# Altium PCB V10_xxxF030F4_20200425.PcbDoc
Units mm, origin at the board's own origin, x right, y up, seen from the top; angles counter-clockwise.
Board outline 36.45 x 71.03 mm, 2 copper layers (Top Layer, Bottom Layer); 13 components, 86 nets, 52 pads, 0 vias.
Unrouted connection lines stored in the file: 14.
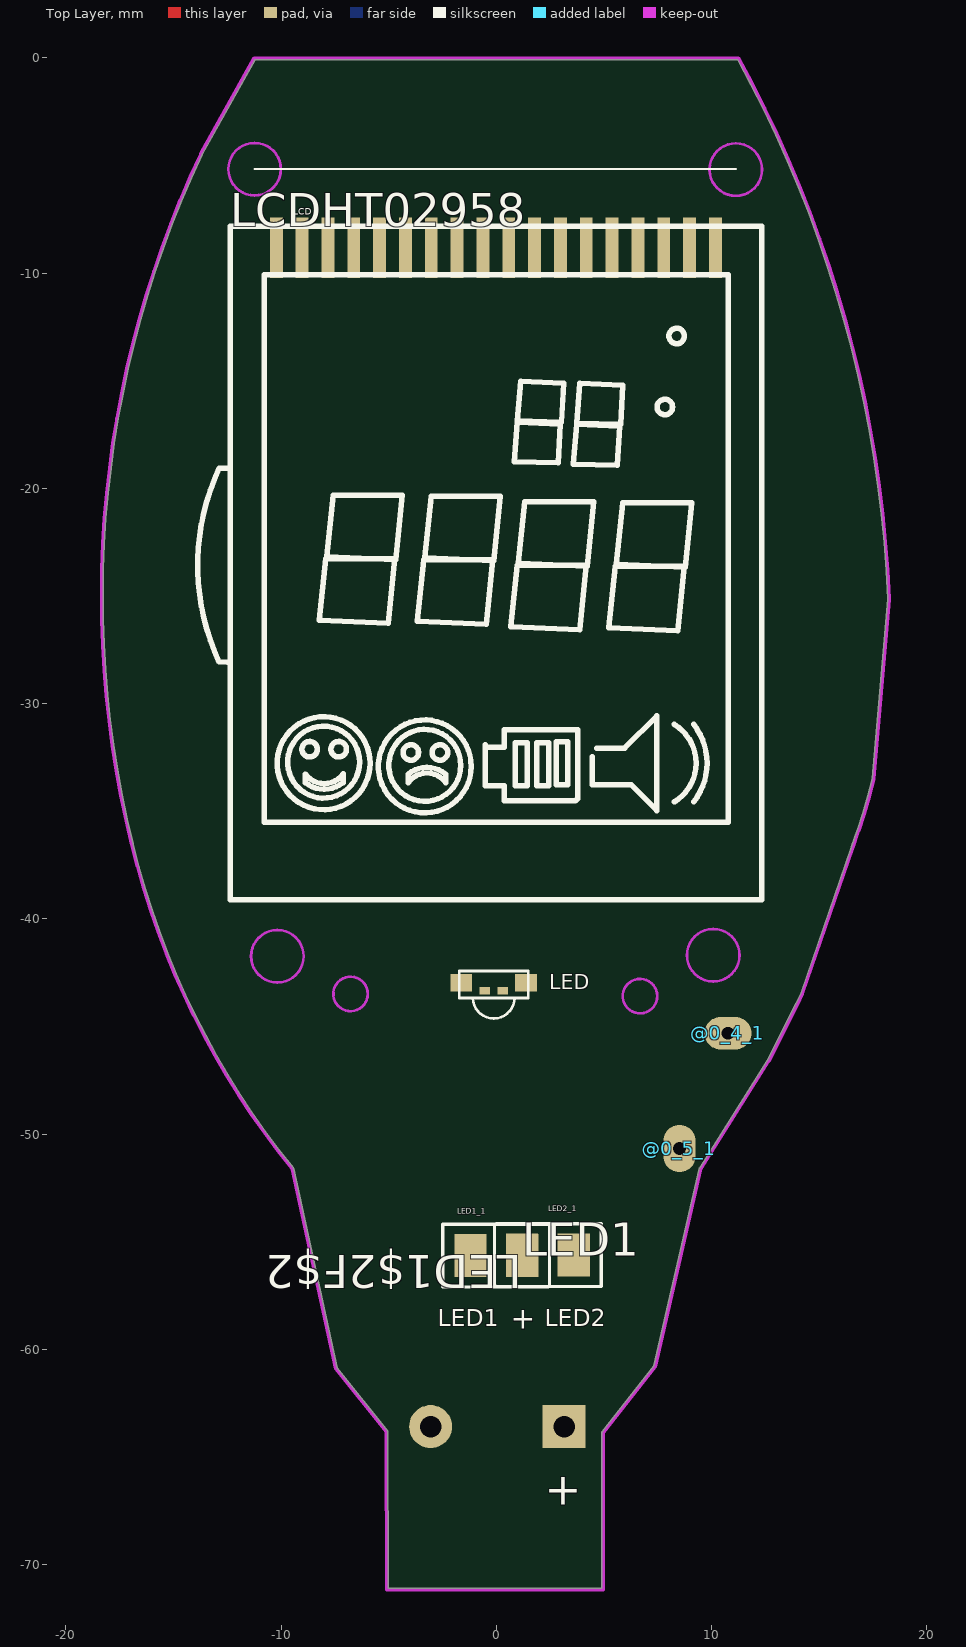
[diagram p0: Top Layer view]
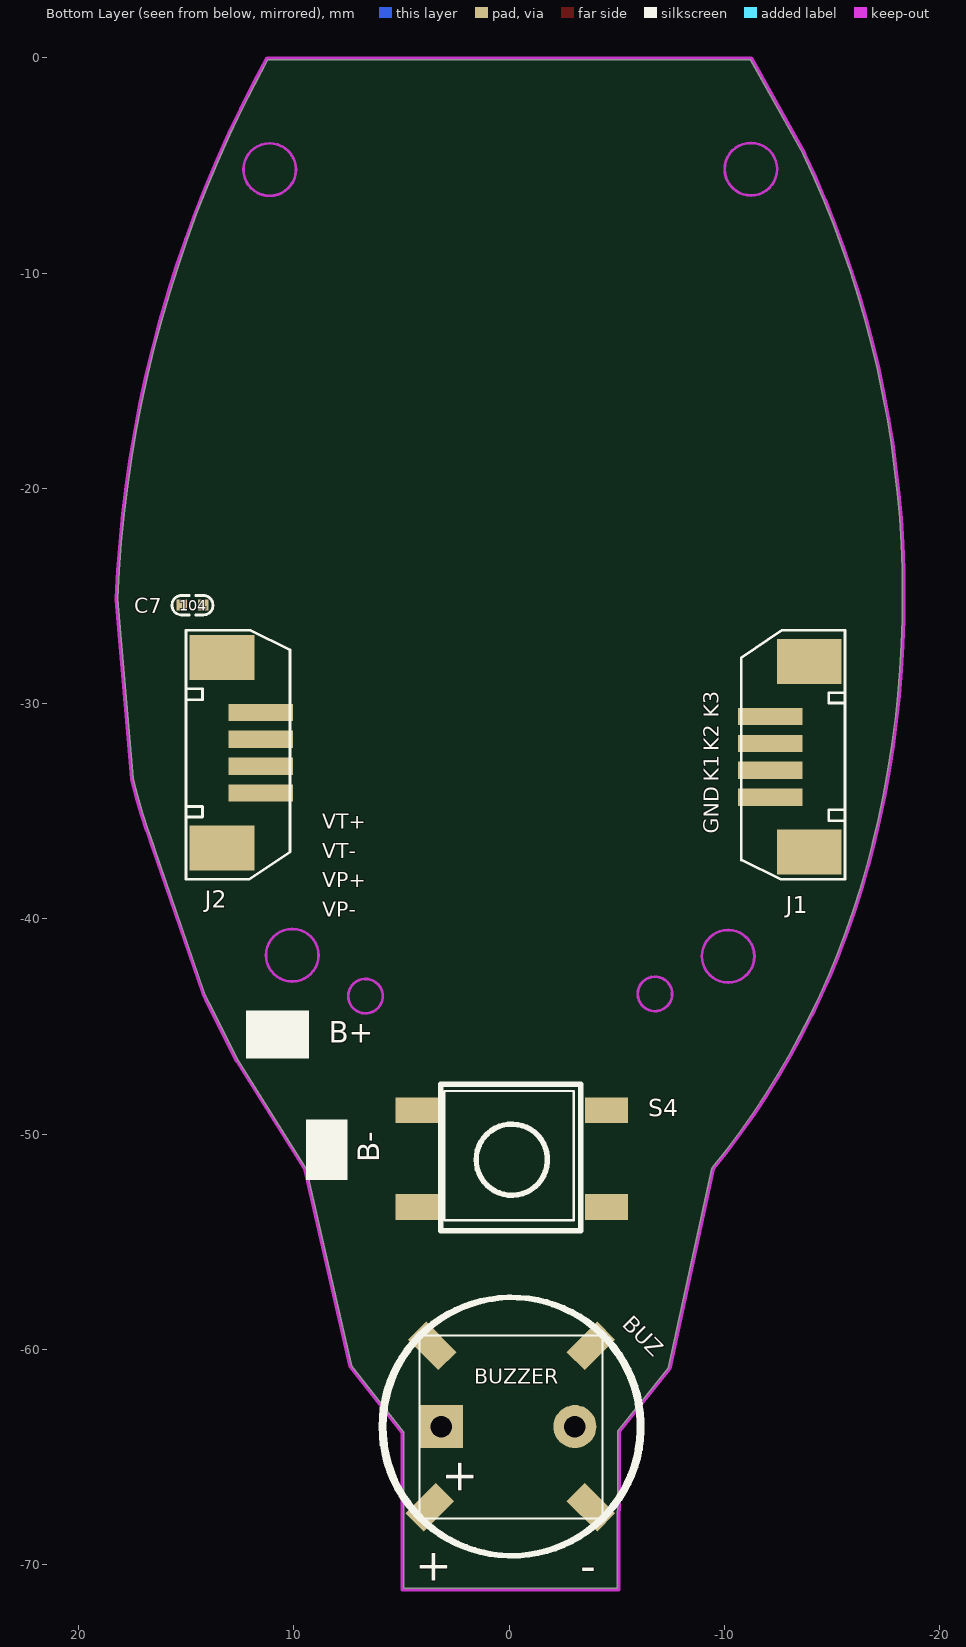
[diagram p1: Bottom Layer view, seen from below]

## Layer stack, top to bottom
Top Solder: solder mask 0.0102, Solder Resist, Dk 3.5
Top Layer: signal copper 0.0356
Dielectric 1: dielectric 0.32, FR-4, Dk 4.8
Bottom Layer: signal copper 0.0356
Bottom Solder: solder mask 0.0102, Solder Resist, Dk 3.5

## Board outline
-7.395,-60.867 -5.049,-63.799 ccw(c-5.108,-63.846) -5.049,-63.799 cw(c-5.108,-63.846) -5.033,-63.846 -5.012,-71.109 4.905,-71.09 4.905,-63.869 cw(c4.98,-63.869) 4.921,-63.822 7.315,-60.774 9.434,-51.589 9.435,-51.589 9.434,-51.589 cw(c9.508,-51.606) 9.444,-51.566 12.595,-46.578 13.944,-43.899 14.157,-43.441 16.486,-36.691 cw(c16.559,-36.707) 16.489,-36.681 ccw(c-10.251,-26.79) 16.496,-36.661 ccw(c-10.251,-26.79) 16.497,-36.659 ccw(c-10.251,-26.79) 17.46,-33.494 cw(c17.533,-33.511) 17.466,-33.478 cw(c17.541,-33.479) 17.466,-33.473 18.181,-25.163 cw(c18.256,-25.169) 18.183,-25.15 cw(c18.254,-25.124) 18.179,-25.127 ccw(c-38.483,-27.403) 11.205,-0.075 -11.206,-0.075 -13.65,-4.454 cw(c-13.716,-4.417) -13.658,-4.465 cw(c-13.731,-4.45) -13.663,-4.482 ccw(c29.76,-25.008) -16.87,-36.521 cw(c-16.942,-36.543) -16.869,-36.525 ccw(c20.196,-27.558) -16.865,-36.541 ccw(c20.196,-27.558) -16.863,-36.548 ccw(c20.196,-27.558) -9.44,-51.557 cw(c-9.498,-51.604) -9.436,-51.561 cw(c-9.491,-51.613) -9.417,-51.597

## Design rules (kind name [scope] priority, off if disabled: settings)
Clearance Clearance_1 [InPolygon] p1: gap=0.4 ignorepadtopadclearanceinfootprint=FALSE except(0: Arc-Hole Track-Hole SMDPad-Hole THPad-Hole Via-Hole Fill-Hole Poly-Hole Region-Hole Text-Hole)
Clearance [All] p2: gap=0.2 ignorepadtopadclearanceinfootprint=FALSE except(0: Arc-Hole Track-Hole SMDPad-Hole THPad-Hole Via-Hole Fill-Hole Poly-Hole Region-Hole Text-Hole)
ComponentClearance [All] p1: gap=0 collisioncheckmode=3 verticalgap=0 showdistances=FALSE
HoleToHoleClearance [All] p1 off: gap=0.254 allowstackedmicrovias=TRUE
MinimumSolderMaskSliver [All] p1 off: minsoldermaskwidth=0.254
NetAntennae [All] p1 off: netantennaetolerance=0
PolygonConnect PolygonConnect_1 [IsVia] p1: connectstyle=Direct reliefconductorwidth=0.254 reliefentries=4 polygonreliefangle="90 Angle" airgapwidth=0.254
PolygonConnect [All] p2: connectstyle=Relief reliefconductorwidth=0.4 reliefentries=4 polygonreliefangle="90 Angle" airgapwidth=0.3
RoutingVias [All] p1: holewidth=0.711 width=1.27 viastyle="Through Hole" minholewidth=0.3 minwidth=0.5 maxholewidth=0.711 maxwidth=1.27
SilkToSilkClearance [All] p1 off: silktosilkclearance=0.254
SilkToSolderMaskClearance [IsPad] p1 off: minsilkscreentomaskgap=0.254 clearancetoexposedcopper=TRUE
SolderMaskExpansion [All] p1: expansion=0.102
Width [All] p1: maxlimit=2 minlimit=0.2 preferedwidth=0.254 minimp=50.000000 maximp=50.000000 favimp=50.000000
24 further rules are at their usual default settings.

## Classes and differential pairs
component class "Copy of 1186+CS1258(1)": C7 T1 T2 T3 T4 T5

## Components (designator, comment, footprint, x,y, rotation, side; value= is the part's Value field where it differs from the comment)
@0_4_1 "FPAD_2" FPAD_2 10.763,-45.314 r180 top
@0_5_1 "FPAD_2" FPAD_2 8.51,-50.671 r90 top
BUZ "" BUZZER_552 1.663,-65.557 r270 bottom locked
BUZ1 "BUZZER" BUZZERA_1 3.148,-63.588 r180 bottom locked
C7 "104" 0402C 14.715,-25.427 r0 bottom
J1 "" CON4-1.0-SMD -13.936,-26.796 r90 bottom locked
J2 "" CON4-1.0-SMD 13.344,-37.957 r270 bottom locked
LCD "LCDHT02958" LCDHT02958 -12.372,-7.818 r0 top locked
LED "" 1204双色侧灯 -0.12,-43.333 r180 top
LED1_1 "LED1" LED1 1.2,-55.641 r0 top locked
LED2_1 "LED1$2F$2" LED1$2F$2 1.192,-55.622 r180 top locked
S4 "" TACTSWITCH6X6 -0.122,-51.288 r0 bottom locked
? "" BUZZERA -0.172,-60.388 r270 bottom locked

## Footprints (in the part's own frame and the unit in brackets; to place one, negate y for a bottom-side part, rotate by r counter-clockwise, add the part's x,y. Pads: shape width x height; smd on the part's side, far side on the other; paste and mask are expansions set on the pad)
0402C [mil]
  rect 20x20 smd: 1(19.69,0) 2(-19.68,0)
  silkscreen extent -37,-18 37,18, body extent -20,-10 20,10, height 13
1204双色侧灯 [mm]
  rect 0.48x0.35 smd: 1(-0.415,0) 2(0.415,0)
  rect 1x0.8 smd: 3(-1.5,-0.36) 4(1.5,-0.36)
  silkscreen extent -1.6,-0.91 1.6,1.3
BUZZER_552 [mm]
  rect 2x1.2 smd rot 135: 1(1.778,-2.032) 2(-5.715,5.461)
  rect 2x1.2 smd rot 45: G(-5.715,-1.905) G(1.778,5.461)
  silkscreen extent -6.2,-2.5 2.3,6
BUZZERA [mm]
  silkscreen extent -2.8,-6 9.2,6
BUZZERA_1 [mm]
  rect 2x2 hole 1: 1(0,0)
  round 2 hole 1: 2(6.2,0)
  silkscreen extent -2.8,-6 9.2,6
CON4-1.0-SMD [mm]
  rect 0.8x3 smd: 1(-7.55,1.8) 2(-6.3,1.8) 3(-5.05,1.8) 4(-3.8,1.8)
  rect 2.1x3 smd: 5(-10.1,0) 6(-1.25,0)
  silkscreen extent -11.36,-1.67 0.2,3.16
FPAD_2 [mm]
  oval 2.2x1.5 hole 0.6: 1(0,0)
LCDHT02958 [mm]
  rect 0.6x2.8 smd: 1(2.15,-1) 2(3.35,-1) 3(4.55,-1) 4(5.75,-1) 5(6.95,-1) 6(8.15,-1) 7(9.35,-1) 8(10.55,-1) 9(11.75,-1) 10(12.95,-1) 11(14.15,-1) 12(15.35,-1) 13(16.55,-1) 14(17.75,-1) 15(18.95,-1) 16(20.15,-1) 17(21.35,-1) 18(22.55,-1)
  silkscreen extent -1.5,-31.3 24.7,0
LED1 [mm]
  rect 1.5x2 smd: 1(0,0) 2(-2.4,0)
  silkscreen extent -3.68,-1.46 1.27,1.46
LED1$2F$2 [mm]
  rect 1.5x2 smd: 1(0,0) 2(-2.4,0)
  silkscreen extent -3.68,-1.46 1.27,1.46
TACTSWITCH6X6 [mm]
  rect 2x1.2 smd: 1(-4.4,2.1) 2(-4.4,-2.4) 3(4.4,2.1) 4(4.4,-2.4)
  silkscreen extent -3.2,-3.6 3.3,3.2

## Part data
BUZ1: library part Speaker
C7: library part Cap, "Capacitor"

## Nets (pads, with @x,y where several pads share a name; then routed paths per layer and width w, separated by ;. In a path a pad name is that pad's centre, name@x,y a point inside that pad or via, vN(x,y) a via of type N, cw(c..) or ccw(c..) an arc to the next point about the centre after c; other vN are vias at no path point)
9V: 
AGND: @0_5_1.1 C7.2 J1.1 J1.5 J1.6 J2.5 J2.6 S4.1 S4.3
AIN0: J2.1
AIN0_1: 
AIN1: 
AIN1_1: J2.2
AIN2: 
AIN2_1: J2.3
AIN3: 
AIN3_1: J2.4
BUZ_VDD: BUZ1.1 BUZ.1
BZ: 
COM0: 
COM1: LCD.18
COM2: LCD.17
COM3: LCD.16
COM4: LCD.15
CS1258_CS: 
CS1258_SCL: 
CS1258_SDA: 
GND: 
GREEN: 
L-: 
LED1: LED1_1.2 LED.1
LED2: LED2_1.2 LED.3
LED+: LED1_1.1 LED2_1.1 LED.2 LED.4
LVD: 
NetBUZ1_1: BUZ1.2 BUZ.G@-3.799,-67.334
NetC6_2: 
NetC8_2: 
NetC14_1: 
NetC15_2: 
NetC20_1: 
NetC20_2: 
NetC21_1: 
NetC21_2: 
NetD1_2: 
NetD2_1: 
NetQ1_B: 
NetQ2_1: 
NetQ2_3: 
NetQ2_D: 
P17: 
PT11: 
PT12: 
PT14: 
PT15: 
PT16: 
PT17: J1.2
PT20: J1.3
PT21: S4.2
PT22: J1.4
PT23: 
PT24: 
PT25: 
PT26: 
PT27: 
Q1_1: 
Q2_1: 
Q3_1: 
RED: 
SCL: 
SDA: 
SEG1: LCD.14
SEG2: LCD.13
SEG3: LCD.12
SEG4: LCD.11
SEG5: LCD.10
SEG6: LCD.9
SEG7: LCD.8
SEG8: LCD.7
SEG9: LCD.6
SEG10: LCD.5
SEG11: LCD.4
SEG12: LCD.3
SEG13: LCD.2
SEG14: LCD.1
VBAT: @0_4_1.1
VDD: C7.1
VDD1: 
VP+: 
VP-: 
VPP: 
VS: 
VT+: 
VT-: 
pads on no net: BUZ.2 BUZ.G@3.568,-59.841 S4.4

## Keep-outs
Keep-Out Layer:
  circle w0.127: c6.678,-43.588 r0.8
  circle w0.127: c-11.229,-5.168 r1.22
  circle w0.127: c11.128,-5.188 r1.22
  circle w0.127: c-10.172,-41.738 r1.22
  circle w0.127: c10.078,-41.688 r1.22
  circle w0.127: c-6.772,-43.488 r0.8
  circle w0.127: c6.678,-43.588 r0.8
  lines w0.15: -16.942,-36.543 ccw(c20.196,-27.558) -9.498,-51.604 ; -16.937,-36.564 cw(c29.76,-25.008) -13.731,-4.45 ; -13.716,-4.417 -11.25,0 11.25,0 ; -9.491,-51.613 -7.465,-60.9 -5.108,-63.846 -5.087,-71.185 4.98,-71.165 4.98,-63.869 7.385,-60.807 9.508,-51.606 12.661,-46.615 14.012,-43.932 14.227,-43.469 16.567,-36.686 ; 11.253,-0.005 cw(c-38.483,-27.403) 18.254,-25.124 ; 16.559,-36.707 ccw(c-10.251,-26.79) 17.533,-33.511 ; 17.541,-33.479 18.256,-25.169

## Other copper
Top Layer:
  pour cut-out: -19.285,-10.977 19.945,-10.977 19.945,-0.587 -19.285,-0.587
Bottom Layer:
  pour cut-out: -19.345,-10.857 19.885,-10.857 19.885,-0.467 -19.345,-0.467

## Silkscreen, mask and mechanical layers (free items; w line width, h text height)
Top Overlay:
  lines w0.1: -11.229,-5.168 11.128,-5.168
  text "LED1" at -2.711,-58.938 h0.8
  text "LED2" at 2.26,-58.938 h0.8
  text "+" at 0.68,-59.038 h1
  text "+" at 2.26,-67.213 h1.5
Bottom Overlay:
  region: 9.45,-52.128 9.45,-49.328 7.519,-49.328 7.519,-52.128
  rectangle: 9.31,-46.478 12.219,-44.248
  lines w0.1: -3,-54 3,-54 3,-48 -3,-48 -3,-54
  text "K3" at -9.726,-30.647 h0.7 r270
  text "K2" at -9.726,-32.217 h0.7 r270
  text "K1" at -9.726,-33.626 h0.7 r270
  text "VT+" at 8.68,-35.823 h0.7
  text "GND" at -9.725,-36.037 h0.7 r270
  text "VT-" at 8.68,-37.18 h0.7
  text "VP+" at 8.68,-38.536 h0.7
  text "VP-" at 8.68,-39.893 h0.7
  text "B+" at 8.38,-45.748 h1
  text "B-" at 6.045,-51.297 h1 r270
  text "+" at 1.65,-66.773 h1.5 r270
  text "+" at 4.37,-70.753 h1.5
  text "-" at -3.309,-70.793 h1.5
Drill Drawing:
  lines w0.025: -0.062,-71.169 -0.062,-71.168